# Altium PCB PCB2.PcbDoc (part 5 of 7)
Units mm, origin at the board's own origin, x right, y up, seen from the top; angles counter-clockwise.
Board outline 49 x 45 mm, 6 copper layers (Component Side, GND1, 3.3V, 1.2V, GND2, Solder Side), stack 1.629 mm thick; 56 components, 116 nets, 925 pads, 478 vias.
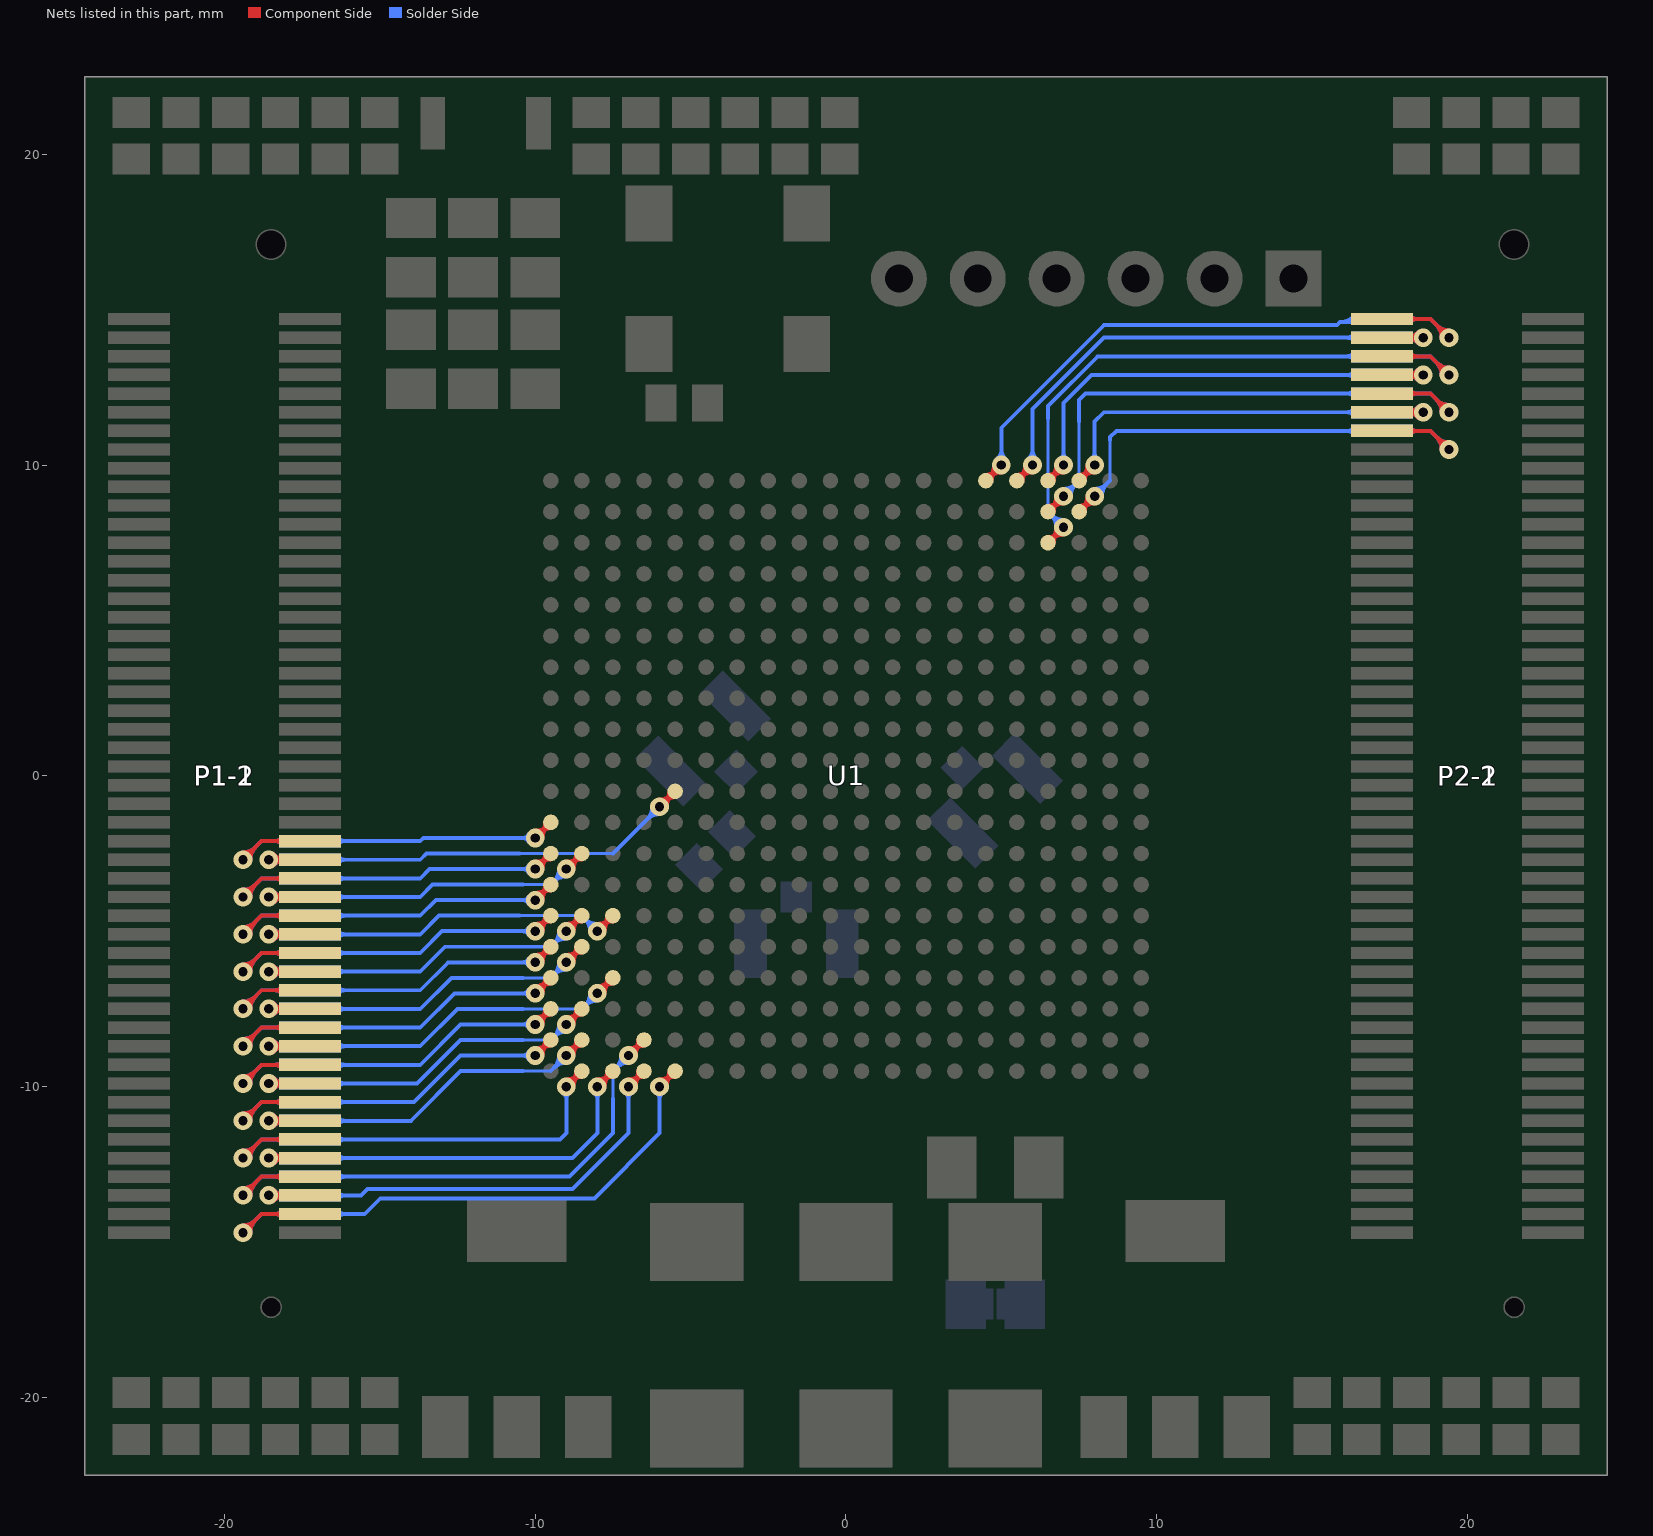
[diagram p9: the nets of this part, all layers, seen from the top]

## Via types
v1: diameter 0.6, hole 0.3, Component Side to Solder Side, tented both sides, 462 vias
v2: diameter 1.5, hole 0.8, Component Side to Solder Side, 10 vias
v3: diameter 1.2, hole 0.6, Component Side to Solder Side, 6 vias

## Nets (pads, with @x,y where several pads share a name; then routed paths per layer and width w, separated by ;. In a path a pad name is that pad's centre, name@x,y a point inside that pad or via, vN(x,y) a via of type N, cw(c..) or ccw(c..) an arc to the next point about the centre after c; other vN are vias at no path point) (continued)
P1-58: P1-1.58 P1-2.58 U1.M1 | length 23.6
  Component Side w0.127: v1(-19.404,-2.7) -18.804,-2.1 P1-1.58@-17.25,-2.1 ; v1(-10,-2) U1.M1@-9.5,-1.5 ; -19,-2.296 ccw(c-18.597,-2.7) -19.168,-2.7 cw(c-18.597,-2.7) -19,-2.296 ; -19,-2.296 cw(c-19.404,-1.893) -19.404,-2.464 ccw(c-19.404,-1.893) -19,-2.296 ; -18.38,-2.1 ccw(c-18.38,-1.77) -18.147,-2.003 cw(c-18.38,-1.77) -18.38,-2.1 ; -18.38,-2.1 cw(c-18.38,-2.43) -18.147,-2.197 ccw(c-18.38,-2.43) -18.38,-2.1 ; v1@-9.818,-1.818 ccw(c-10.137,-1.5) -9.686,-1.5 cw(c-10.137,-1.5) v1@-9.818,-1.818 ; v1@-9.818,-1.818 cw(c-9.5,-2.137) -9.5,-1.686 ccw(c-9.5,-2.137) v1@-9.818,-1.818 ; U1.M1@-9.596,-1.596 ccw(c-9.193,-2) -9.764,-2 cw(c-9.193,-2) U1.M1@-9.596,-1.596 ; U1.M1@-9.596,-1.596 cw(c-10,-1.193) -10,-1.764 ccw(c-10,-1.193) U1.M1@-9.596,-1.596
  Solder Side w0.127: v1(-19.404,-2.7) -18.804,-2.1 P1-2.58@-17.25,-2.1 -13.7,-2.1 -13.6,-2 -11.5,-2 -10.385,-2 ; v1(-10,-2) -10.385,-2 ; -19,-2.296 ccw(c-18.597,-2.7) -19.168,-2.7 cw(c-18.597,-2.7) -19,-2.296 ; -19,-2.296 cw(c-19.404,-1.893) -19.404,-2.464 ccw(c-19.404,-1.893) -19,-2.296 ; -18.38,-2.1 ccw(c-18.38,-1.77) -18.147,-2.003 cw(c-18.38,-1.77) -18.38,-2.1 ; -18.38,-2.1 cw(c-18.38,-2.43) -18.147,-2.197 ccw(c-18.38,-2.43) -18.38,-2.1 ; -16.12,-2.1 ccw(c-16.12,-2.43) -16.353,-2.197 cw(c-16.12,-2.43) -16.12,-2.1 ; -16.121,-2.1 cw(c-16.121,-1.771) -16.353,-2.003 ccw(c-16.121,-1.771) -16.121,-2.1 ; -10.385,-2 ccw(c-10.385,-1.805) -10.211,-1.893 cw(c-10.385,-1.805) -10.385,-2 ; -10.385,-2 cw(c-10.385,-2.195) -10.211,-2.107 ccw(c-10.385,-2.195) -10.385,-2
P1-60: P1-1.60 P1-2.60 U1.L5 | length 27.2
  Component Side w0.127: v1@-18.677,-2.7 v1(-18.577,-2.7) P1-1.60@-17.25,-2.7 ; v1(-6,-1) U1.L5@-5.5,-0.5 ; v1@-18.38,-2.7 ccw(c-18.38,-2.37) -18.147,-2.603 cw(c-18.38,-2.37) v1@-18.38,-2.7 ; v1@-18.38,-2.7 cw(c-18.38,-3.03) -18.147,-2.797 ccw(c-18.38,-3.03) v1@-18.38,-2.7 ; P1-1.60@-18.006,-2.7 ccw(c-18.006,-3.271) -18.41,-2.867 cw(c-18.006,-3.271) P1-1.60@-18.006,-2.7 ; P1-1.60@-18.006,-2.7 cw(c-18.006,-2.129) -18.41,-2.533 ccw(c-18.006,-2.129) P1-1.60@-18.006,-2.7 ; v1@-5.818,-0.818 ccw(c-6.137,-0.5) -5.687,-0.5 cw(c-6.137,-0.5) v1@-5.818,-0.818 ; v1@-5.818,-0.818 cw(c-5.5,-1.137) -5.5,-0.686 ccw(c-5.5,-1.137) v1@-5.818,-0.818 ; U1.L5@-5.596,-0.596 ccw(c-5.193,-1) -5.764,-1 cw(c-5.193,-1) U1.L5@-5.596,-0.596 ; U1.L5@-5.596,-0.596 cw(c-6,-0.193) -6,-0.764 ccw(c-6,-0.193) U1.L5@-5.596,-0.596
  Solder Side w0.1: -10.5,-2.5 -7.5,-2.5
  Solder Side w0.127: v1@-18.677,-2.7 v1(-18.577,-2.7) P1-2.60@-17.25,-2.7 -13.7,-2.7 -13.5,-2.5 -11.5,-2.5 -10.5,-2.5 ; -7.5,-2.5 v1(-6,-1) ; v1@-18.38,-2.7 ccw(c-18.38,-2.37) -18.147,-2.603 cw(c-18.38,-2.37) v1@-18.38,-2.7 ; v1@-18.38,-2.7 cw(c-18.38,-3.03) -18.147,-2.797 ccw(c-18.38,-3.03) v1@-18.38,-2.7 ; P1-2.60@-18.006,-2.7 ccw(c-18.006,-3.271) -18.41,-2.867 cw(c-18.006,-3.271) P1-2.60@-18.006,-2.7 ; P1-2.60@-18.006,-2.7 cw(c-18.006,-2.129) -18.41,-2.533 ccw(c-18.006,-2.129) P1-2.60@-18.006,-2.7 ; -16.12,-2.7 ccw(c-16.12,-3.03) -16.353,-2.797 cw(c-16.12,-3.03) -16.12,-2.7 ; -16.121,-2.7 cw(c-16.121,-2.371) -16.353,-2.603 ccw(c-16.121,-2.371) -16.121,-2.7 ; -6.404,-1.404 ccw(c-6.807,-1) -6.237,-1 cw(c-6.807,-1) -6.404,-1.404 ; -6.404,-1.404 cw(c-6,-1.807) -6,-1.237 ccw(c-6,-1.807) -6.404,-1.404
P1-62: P1-1.62 P1-2.62 U1.N1 | length 23.7
  Component Side w0.127: v1(-19.404,-3.9) -18.804,-3.3 P1-1.62@-17.25,-3.3 ; v1(-10,-3) U1.N1@-9.5,-2.5 ; -19,-3.496 ccw(c-18.597,-3.9) -19.168,-3.9 cw(c-18.597,-3.9) -19,-3.496 ; -19,-3.496 cw(c-19.404,-3.093) -19.404,-3.664 ccw(c-19.404,-3.093) -19,-3.496 ; -18.38,-3.3 ccw(c-18.38,-2.97) -18.147,-3.203 cw(c-18.38,-2.97) -18.38,-3.3 ; -18.38,-3.3 cw(c-18.38,-3.63) -18.147,-3.397 ccw(c-18.38,-3.63) -18.38,-3.3 ; v1@-9.818,-2.818 ccw(c-10.137,-2.5) -9.686,-2.5 cw(c-10.137,-2.5) v1@-9.818,-2.818 ; v1@-9.818,-2.818 cw(c-9.5,-3.137) -9.5,-2.686 ccw(c-9.5,-3.137) v1@-9.818,-2.818 ; U1.N1@-9.596,-2.596 ccw(c-9.193,-3) -9.764,-3 cw(c-9.193,-3) U1.N1@-9.596,-2.596 ; U1.N1@-9.596,-2.596 cw(c-10,-2.193) -10,-2.764 ccw(c-10,-2.193) U1.N1@-9.596,-2.596
  Solder Side w0.127: v1(-19.404,-3.9) -18.804,-3.3 P1-2.62@-17.25,-3.3 ; P1-2.62@-17.2,-3.3 P1-2.62@-17.25,-3.3 ; v1(-10,-3) -10.385,-3 ; -19,-3.496 ccw(c-18.597,-3.9) -19.168,-3.9 cw(c-18.597,-3.9) -19,-3.496 ; -19,-3.496 cw(c-19.404,-3.093) -19.404,-3.664 ccw(c-19.404,-3.093) -19,-3.496 ; -18.38,-3.3 ccw(c-18.38,-2.97) -18.147,-3.203 cw(c-18.38,-2.97) -18.38,-3.3 ; -18.38,-3.3 cw(c-18.38,-3.63) -18.147,-3.397 ccw(c-18.38,-3.63) -18.38,-3.3 ; P1-2.62@-17.25,-3.3 -13.7,-3.3 -13.4,-3 -11.5,-3 -10.385,-3 ; -16.12,-3.3 ccw(c-16.12,-3.63) -16.353,-3.397 cw(c-16.12,-3.63) -16.12,-3.3 ; -16.121,-3.3 cw(c-16.121,-2.971) -16.353,-3.203 ccw(c-16.121,-2.971) -16.121,-3.3 ; -10.385,-3 ccw(c-10.385,-2.805) -10.211,-2.893 cw(c-10.385,-2.805) -10.385,-3 ; -10.385,-3 cw(c-10.385,-3.195) -10.211,-3.107 ccw(c-10.385,-3.195) -10.385,-3
P1-64: P1-1.64 P1-2.64 U1.N2 | length 23.9
  Component Side w0.127: v1@-18.677,-3.9 v1(-18.577,-3.9) P1-1.64@-17.25,-3.9 ; v1(-9,-3) U1.N2@-8.5,-2.5 ; v1@-18.38,-3.9 ccw(c-18.38,-3.57) -18.147,-3.803 cw(c-18.38,-3.57) v1@-18.38,-3.9 ; v1@-18.38,-3.9 cw(c-18.38,-4.23) -18.147,-3.997 ccw(c-18.38,-4.23) v1@-18.38,-3.9 ; P1-1.64@-18.006,-3.9 ccw(c-18.006,-4.471) -18.41,-4.067 cw(c-18.006,-4.471) P1-1.64@-18.006,-3.9 ; P1-1.64@-18.006,-3.9 cw(c-18.006,-3.329) -18.41,-3.733 ccw(c-18.006,-3.329) P1-1.64@-18.006,-3.9 ; v1@-8.818,-2.818 ccw(c-9.137,-2.5) -8.686,-2.5 cw(c-9.137,-2.5) v1@-8.818,-2.818 ; v1@-8.818,-2.818 cw(c-8.5,-3.137) -8.5,-2.686 ccw(c-8.5,-3.137) v1@-8.818,-2.818 ; U1.N2@-8.596,-2.596 ccw(c-8.193,-3) -8.764,-3 cw(c-8.193,-3) U1.N2@-8.596,-2.596 ; U1.N2@-8.596,-2.596 cw(c-9,-2.193) -9,-2.764 ccw(c-9,-2.193) U1.N2@-8.596,-2.596
  Solder Side w0.1: -10.385,-3.5 -9.5,-3.5
  Solder Side w0.127: v1@-18.677,-3.9 v1(-18.577,-3.9) P1-2.64@-17.25,-3.9 -13.7,-3.9 -13.3,-3.5 -11.5,-3.5 -10.385,-3.5 ; -9.5,-3.5 v1(-9,-3) ; v1@-18.38,-3.9 ccw(c-18.38,-3.57) -18.147,-3.803 cw(c-18.38,-3.57) v1@-18.38,-3.9 ; v1@-18.38,-3.9 cw(c-18.38,-4.23) -18.147,-3.997 ccw(c-18.38,-4.23) v1@-18.38,-3.9 ; P1-2.64@-18.006,-3.9 ccw(c-18.006,-4.471) -18.41,-4.067 cw(c-18.006,-4.471) P1-2.64@-18.006,-3.9 ; P1-2.64@-18.006,-3.9 cw(c-18.006,-3.329) -18.41,-3.733 ccw(c-18.006,-3.329) P1-2.64@-18.006,-3.9 ; -16.12,-3.9 ccw(c-16.12,-4.23) -16.353,-3.997 cw(c-16.12,-4.23) -16.12,-3.9 ; -16.121,-3.9 cw(c-16.121,-3.571) -16.353,-3.803 ccw(c-16.121,-3.571) -16.121,-3.9 ; -9.404,-3.404 ccw(c-9.807,-3) -9.237,-3 cw(c-9.807,-3) -9.404,-3.404 ; -9.404,-3.404 cw(c-9,-3.807) -9,-3.237 ccw(c-9,-3.807) -9.404,-3.404
P1-66: P1-1.66 P1-2.66 U1.P1 | length 23.8
  Component Side w0.127: v1(-19.404,-5.1) -18.804,-4.5 P1-1.66@-17.25,-4.5 ; v1(-10,-4) U1.P1@-9.5,-3.5 ; -19,-4.696 ccw(c-18.597,-5.1) -19.168,-5.1 cw(c-18.597,-5.1) -19,-4.696 ; -19,-4.696 cw(c-19.404,-4.293) -19.404,-4.864 ccw(c-19.404,-4.293) -19,-4.696 ; -18.38,-4.5 ccw(c-18.38,-4.17) -18.147,-4.403 cw(c-18.38,-4.17) -18.38,-4.5 ; -18.38,-4.5 cw(c-18.38,-4.83) -18.147,-4.597 ccw(c-18.38,-4.83) -18.38,-4.5 ; v1@-9.818,-3.818 ccw(c-10.137,-3.5) -9.686,-3.5 cw(c-10.137,-3.5) v1@-9.818,-3.818 ; v1@-9.818,-3.818 cw(c-9.5,-4.137) -9.5,-3.686 ccw(c-9.5,-4.137) v1@-9.818,-3.818 ; U1.P1@-9.596,-3.596 ccw(c-9.193,-4) -9.764,-4 cw(c-9.193,-4) U1.P1@-9.596,-3.596 ; U1.P1@-9.596,-3.596 cw(c-10,-3.193) -10,-3.764 ccw(c-10,-3.193) U1.P1@-9.596,-3.596
  Solder Side w0.127: v1(-19.404,-5.1) -18.804,-4.5 P1-2.66@-17.25,-4.5 ; P1-2.66@-17.2,-4.5 P1-2.66@-17.25,-4.5 ; v1(-10,-4) -10.385,-4 ; -19,-4.696 ccw(c-18.597,-5.1) -19.168,-5.1 cw(c-18.597,-5.1) -19,-4.696 ; -19,-4.696 cw(c-19.404,-4.293) -19.404,-4.864 ccw(c-19.404,-4.293) -19,-4.696 ; -18.38,-4.5 ccw(c-18.38,-4.17) -18.147,-4.403 cw(c-18.38,-4.17) -18.38,-4.5 ; -18.38,-4.5 cw(c-18.38,-4.83) -18.147,-4.597 ccw(c-18.38,-4.83) -18.38,-4.5 ; P1-2.66@-17.25,-4.5 -13.7,-4.5 -13.2,-4 -11.5,-4 -10.385,-4 ; -16.12,-4.5 ccw(c-16.12,-4.83) -16.353,-4.597 cw(c-16.12,-4.83) -16.12,-4.5 ; -16.121,-4.5 cw(c-16.121,-4.171) -16.353,-4.403 ccw(c-16.121,-4.171) -16.121,-4.5 ; -10.385,-4 ccw(c-10.385,-3.805) -10.211,-3.893 cw(c-10.385,-3.805) -10.385,-4 ; -10.385,-4 cw(c-10.385,-4.195) -10.211,-4.107 ccw(c-10.385,-4.195) -10.385,-4
P1-68: P1-1.68 P1-2.68 U1.R3 | length 26.2
  Component Side w0.127: v1@-18.677,-5.1 v1(-18.577,-5.1) P1-1.68@-17.25,-5.1 ; v1(-8,-5) U1.R3@-7.5,-4.5 ; v1@-18.38,-5.1 ccw(c-18.38,-4.77) -18.147,-5.003 cw(c-18.38,-4.77) v1@-18.38,-5.1 ; v1@-18.38,-5.1 cw(c-18.38,-5.43) -18.147,-5.197 ccw(c-18.38,-5.43) v1@-18.38,-5.1 ; P1-1.68@-18.006,-5.1 ccw(c-18.006,-5.671) -18.41,-5.267 cw(c-18.006,-5.671) P1-1.68@-18.006,-5.1 ; P1-1.68@-18.006,-5.1 cw(c-18.006,-4.529) -18.41,-4.933 ccw(c-18.006,-4.529) P1-1.68@-18.006,-5.1 ; v1@-7.818,-4.818 ccw(c-8.137,-4.5) -7.686,-4.5 cw(c-8.137,-4.5) v1@-7.818,-4.818 ; v1@-7.818,-4.818 cw(c-7.5,-5.137) -7.5,-4.686 ccw(c-7.5,-5.137) v1@-7.818,-4.818 ; U1.R3@-7.596,-4.596 ccw(c-7.193,-5) -7.764,-5 cw(c-7.193,-5) U1.R3@-7.596,-4.596 ; U1.R3@-7.596,-4.596 cw(c-8,-4.193) -8,-4.764 ccw(c-8,-4.193) U1.R3@-7.596,-4.596
  Solder Side w0.1: -10.5,-4.5 -8.5,-4.5 v1(-8,-5) ; -8.427,-4.573 ccw(c-8,-4.146) -8,-4.75 cw(c-8,-4.146) -8.427,-4.573 ; -8.427,-4.573 cw(c-8.854,-5) -8.25,-5 ccw(c-8.854,-5) -8.427,-4.573 ; -8.256,-4.744 ccw(c-8,-4.488) -8,-4.85 cw(c-8,-4.488) -8.256,-4.744 ; -8.256,-4.744 cw(c-8.512,-5) -8.15,-5 ccw(c-8.512,-5) -8.256,-4.744
  Solder Side w0.127: v1@-18.677,-5.1 v1(-18.577,-5.1) P1-2.68@-17.25,-5.1 -13.7,-5.1 -13.1,-4.5 -11.5,-4.5 -10.5,-4.5 ; v1@-18.38,-5.1 ccw(c-18.38,-4.77) -18.147,-5.003 cw(c-18.38,-4.77) v1@-18.38,-5.1 ; v1@-18.38,-5.1 cw(c-18.38,-5.43) -18.147,-5.197 ccw(c-18.38,-5.43) v1@-18.38,-5.1 ; P1-2.68@-18.006,-5.1 ccw(c-18.006,-5.671) -18.41,-5.267 cw(c-18.006,-5.671) P1-2.68@-18.006,-5.1 ; P1-2.68@-18.006,-5.1 cw(c-18.006,-4.529) -18.41,-4.933 ccw(c-18.006,-4.529) P1-2.68@-18.006,-5.1 ; -16.12,-5.1 ccw(c-16.12,-5.43) -16.353,-5.197 cw(c-16.12,-5.43) -16.12,-5.1 ; -16.121,-5.1 cw(c-16.121,-4.771) -16.353,-5.003 ccw(c-16.121,-4.771) -16.121,-5.1
P1-70: P1-1.70 P1-2.70 U1.R1 | length 23.8
  Component Side w0.127: v1(-19.404,-6.3) -18.804,-5.7 P1-1.70@-17.25,-5.7 ; v1(-10,-5) U1.R1@-9.5,-4.5 ; -19,-5.896 ccw(c-18.597,-6.3) -19.168,-6.3 cw(c-18.597,-6.3) -19,-5.896 ; -19,-5.896 cw(c-19.404,-5.493) -19.404,-6.064 ccw(c-19.404,-5.493) -19,-5.896 ; -18.38,-5.7 ccw(c-18.38,-5.37) -18.147,-5.603 cw(c-18.38,-5.37) -18.38,-5.7 ; -18.38,-5.7 cw(c-18.38,-6.03) -18.147,-5.797 ccw(c-18.38,-6.03) -18.38,-5.7 ; v1@-9.818,-4.818 ccw(c-10.137,-4.5) -9.686,-4.5 cw(c-10.137,-4.5) v1@-9.818,-4.818 ; v1@-9.818,-4.818 cw(c-9.5,-5.137) -9.5,-4.686 ccw(c-9.5,-5.137) v1@-9.818,-4.818 ; U1.R1@-9.596,-4.596 ccw(c-9.193,-5) -9.764,-5 cw(c-9.193,-5) U1.R1@-9.596,-4.596 ; U1.R1@-9.596,-4.596 cw(c-10,-4.193) -10,-4.764 ccw(c-10,-4.193) U1.R1@-9.596,-4.596
  Solder Side w0.127: v1(-19.404,-6.3) -18.804,-5.7 P1-2.70@-17.25,-5.7 -13.7,-5.7 -13,-5 -11.5,-5 -10.385,-5 ; v1(-10,-5) -10.385,-5 ; -19,-5.896 ccw(c-18.597,-6.3) -19.168,-6.3 cw(c-18.597,-6.3) -19,-5.896 ; -19,-5.896 cw(c-19.404,-5.493) -19.404,-6.064 ccw(c-19.404,-5.493) -19,-5.896 ; -18.38,-5.7 ccw(c-18.38,-5.37) -18.147,-5.603 cw(c-18.38,-5.37) -18.38,-5.7 ; -18.38,-5.7 cw(c-18.38,-6.03) -18.147,-5.797 ccw(c-18.38,-6.03) -18.38,-5.7 ; -16.12,-5.7 ccw(c-16.12,-6.03) -16.353,-5.797 cw(c-16.12,-6.03) -16.12,-5.7 ; -16.121,-5.7 cw(c-16.121,-5.371) -16.353,-5.603 ccw(c-16.121,-5.371) -16.121,-5.7 ; -10.385,-5 ccw(c-10.385,-4.805) -10.211,-4.893 cw(c-10.385,-4.805) -10.385,-5 ; -10.385,-5 cw(c-10.385,-5.195) -10.211,-5.107 ccw(c-10.385,-5.195) -10.385,-5
P1-72: P1-1.72 P1-2.72 U1.R2 | length 24
  Component Side w0.127: v1@-18.677,-6.3 v1(-18.577,-6.3) P1-1.72@-17.25,-6.3 ; v1(-9,-5) U1.R2@-8.5,-4.5 ; v1@-18.38,-6.3 ccw(c-18.38,-5.97) -18.147,-6.203 cw(c-18.38,-5.97) v1@-18.38,-6.3 ; v1@-18.38,-6.3 cw(c-18.38,-6.63) -18.147,-6.397 ccw(c-18.38,-6.63) v1@-18.38,-6.3 ; P1-1.72@-18.006,-6.3 ccw(c-18.006,-6.871) -18.41,-6.467 cw(c-18.006,-6.871) P1-1.72@-18.006,-6.3 ; P1-1.72@-18.006,-6.3 cw(c-18.006,-5.729) -18.41,-6.133 ccw(c-18.006,-5.729) P1-1.72@-18.006,-6.3 ; v1@-8.818,-4.818 ccw(c-9.137,-4.5) -8.686,-4.5 cw(c-9.137,-4.5) v1@-8.818,-4.818 ; v1@-8.818,-4.818 cw(c-8.5,-5.137) -8.5,-4.686 ccw(c-8.5,-5.137) v1@-8.818,-4.818 ; U1.R2@-8.596,-4.596 ccw(c-8.193,-5) -8.764,-5 cw(c-8.193,-5) U1.R2@-8.596,-4.596 ; U1.R2@-8.596,-4.596 cw(c-9,-4.193) -9,-4.764 ccw(c-9,-4.193) U1.R2@-8.596,-4.596
  Solder Side w0.1: -10.385,-5.5 -9.5,-5.5
  Solder Side w0.127: v1@-18.677,-6.3 v1(-18.577,-6.3) P1-2.72@-17.25,-6.3 -13.7,-6.3 -12.9,-5.5 -11.5,-5.5 -10.385,-5.5 ; -9.5,-5.5 v1(-9,-5) ; v1@-18.38,-6.3 ccw(c-18.38,-5.97) -18.147,-6.203 cw(c-18.38,-5.97) v1@-18.38,-6.3 ; v1@-18.38,-6.3 cw(c-18.38,-6.63) -18.147,-6.397 ccw(c-18.38,-6.63) v1@-18.38,-6.3 ; P1-2.72@-18.006,-6.3 ccw(c-18.006,-6.871) -18.41,-6.467 cw(c-18.006,-6.871) P1-2.72@-18.006,-6.3 ; P1-2.72@-18.006,-6.3 cw(c-18.006,-5.729) -18.41,-6.133 ccw(c-18.006,-5.729) P1-2.72@-18.006,-6.3 ; -16.12,-6.3 ccw(c-16.12,-6.63) -16.353,-6.397 cw(c-16.12,-6.63) -16.12,-6.3 ; -16.121,-6.3 cw(c-16.121,-5.971) -16.353,-6.203 ccw(c-16.121,-5.971) -16.121,-6.3 ; -9.404,-5.404 ccw(c-9.807,-5) -9.237,-5 cw(c-9.807,-5) -9.404,-5.404 ; -9.404,-5.404 cw(c-9,-5.807) -9,-5.237 ccw(c-9,-5.807) -9.404,-5.404
P1-74: P1-1.74 P1-2.74 U1.T1 | length 23.9
  Component Side w0.127: v1(-19.404,-7.5) -18.804,-6.9 P1-1.74@-17.25,-6.9 ; v1(-10,-6) U1.T1@-9.5,-5.5 ; -19,-7.096 ccw(c-18.597,-7.5) -19.168,-7.5 cw(c-18.597,-7.5) -19,-7.096 ; -19,-7.096 cw(c-19.404,-6.693) -19.404,-7.264 ccw(c-19.404,-6.693) -19,-7.096 ; -18.38,-6.9 ccw(c-18.38,-6.57) -18.147,-6.803 cw(c-18.38,-6.57) -18.38,-6.9 ; -18.38,-6.9 cw(c-18.38,-7.23) -18.147,-6.997 ccw(c-18.38,-7.23) -18.38,-6.9 ; v1@-9.818,-5.818 ccw(c-10.137,-5.5) -9.686,-5.5 cw(c-10.137,-5.5) v1@-9.818,-5.818 ; v1@-9.818,-5.818 cw(c-9.5,-6.137) -9.5,-5.686 ccw(c-9.5,-6.137) v1@-9.818,-5.818 ; U1.T1@-9.596,-5.596 ccw(c-9.193,-6) -9.764,-6 cw(c-9.193,-6) U1.T1@-9.596,-5.596 ; U1.T1@-9.596,-5.596 cw(c-10,-5.193) -10,-5.764 ccw(c-10,-5.193) U1.T1@-9.596,-5.596
  Solder Side w0.127: v1(-19.404,-7.5) -18.804,-6.9 P1-2.74@-17.25,-6.9 ; P1-2.74@-17.2,-6.9 P1-2.74@-17.25,-6.9 ; v1(-10,-6) -10.385,-6 ; -19,-7.096 ccw(c-18.597,-7.5) -19.168,-7.5 cw(c-18.597,-7.5) -19,-7.096 ; -19,-7.096 cw(c-19.404,-6.693) -19.404,-7.264 ccw(c-19.404,-6.693) -19,-7.096 ; -18.38,-6.9 ccw(c-18.38,-6.57) -18.147,-6.803 cw(c-18.38,-6.57) -18.38,-6.9 ; -18.38,-6.9 cw(c-18.38,-7.23) -18.147,-6.997 ccw(c-18.38,-7.23) -18.38,-6.9 ; P1-2.74@-17.25,-6.9 -13.7,-6.9 -12.8,-6 -11.5,-6 -10.385,-6 ; -16.12,-6.9 ccw(c-16.12,-7.23) -16.353,-6.997 cw(c-16.12,-7.23) -16.12,-6.9 ; -16.121,-6.9 cw(c-16.121,-6.571) -16.353,-6.803 ccw(c-16.121,-6.571) -16.121,-6.9 ; -10.385,-6 ccw(c-10.385,-5.805) -10.211,-5.893 cw(c-10.385,-5.805) -10.385,-6 ; -10.385,-6 cw(c-10.385,-6.195) -10.211,-6.107 ccw(c-10.385,-6.195) -10.385,-6
P1-76: P1-1.76 P1-2.76 U1.T2 | length 24.1
  Component Side w0.127: v1@-18.677,-7.5 v1(-18.577,-7.5) P1-1.76@-17.25,-7.5 ; v1(-9,-6) U1.T2@-8.5,-5.5 ; v1@-18.38,-7.5 ccw(c-18.38,-7.17) -18.147,-7.403 cw(c-18.38,-7.17) v1@-18.38,-7.5 ; v1@-18.38,-7.5 cw(c-18.38,-7.83) -18.147,-7.597 ccw(c-18.38,-7.83) v1@-18.38,-7.5 ; P1-1.76@-18.006,-7.5 ccw(c-18.006,-8.071) -18.41,-7.667 cw(c-18.006,-8.071) P1-1.76@-18.006,-7.5 ; P1-1.76@-18.006,-7.5 cw(c-18.006,-6.929) -18.41,-7.333 ccw(c-18.006,-6.929) P1-1.76@-18.006,-7.5 ; v1@-8.818,-5.818 ccw(c-9.137,-5.5) -8.686,-5.5 cw(c-9.137,-5.5) v1@-8.818,-5.818 ; v1@-8.818,-5.818 cw(c-8.5,-6.137) -8.5,-5.686 ccw(c-8.5,-6.137) v1@-8.818,-5.818 ; U1.T2@-8.596,-5.596 ccw(c-8.193,-6) -8.764,-6 cw(c-8.193,-6) U1.T2@-8.596,-5.596 ; U1.T2@-8.596,-5.596 cw(c-9,-5.193) -9,-5.764 ccw(c-9,-5.193) U1.T2@-8.596,-5.596
  Solder Side w0.1: -10.385,-6.5 -9.5,-6.5
  Solder Side w0.127: v1@-18.677,-7.5 v1(-18.577,-7.5) P1-2.76@-17.25,-7.5 -13.7,-7.5 -12.7,-6.5 -11.5,-6.5 -10.385,-6.5 ; -9.5,-6.5 v1(-9,-6) ; v1@-18.38,-7.5 ccw(c-18.38,-7.17) -18.147,-7.403 cw(c-18.38,-7.17) v1@-18.38,-7.5 ; v1@-18.38,-7.5 cw(c-18.38,-7.83) -18.147,-7.597 ccw(c-18.38,-7.83) v1@-18.38,-7.5 ; P1-2.76@-18.006,-7.5 ccw(c-18.006,-8.071) -18.41,-7.667 cw(c-18.006,-8.071) P1-2.76@-18.006,-7.5 ; P1-2.76@-18.006,-7.5 cw(c-18.006,-6.929) -18.41,-7.333 ccw(c-18.006,-6.929) P1-2.76@-18.006,-7.5 ; -16.12,-7.5 ccw(c-16.12,-7.83) -16.353,-7.597 cw(c-16.12,-7.83) -16.12,-7.5 ; -16.121,-7.5 cw(c-16.121,-7.171) -16.353,-7.403 ccw(c-16.121,-7.171) -16.121,-7.5 ; -9.404,-6.404 ccw(c-9.807,-6) -9.237,-6 cw(c-9.807,-6) -9.404,-6.404 ; -9.404,-6.404 cw(c-9,-6.807) -9,-6.237 ccw(c-9,-6.807) -9.404,-6.404
P1-78: P1-1.78 P1-2.78 U1.U1 | length 24
  Component Side w0.127: v1(-19.404,-8.7) -18.804,-8.1 P1-1.78@-17.25,-8.1 ; v1(-10,-7) U1.U1@-9.5,-6.5 ; -19,-8.296 ccw(c-18.597,-8.7) -19.168,-8.7 cw(c-18.597,-8.7) -19,-8.296 ; -19,-8.296 cw(c-19.404,-7.893) -19.404,-8.464 ccw(c-19.404,-7.893) -19,-8.296 ; -18.38,-8.1 ccw(c-18.38,-7.77) -18.147,-8.003 cw(c-18.38,-7.77) -18.38,-8.1 ; -18.38,-8.1 cw(c-18.38,-8.43) -18.147,-8.197 ccw(c-18.38,-8.43) -18.38,-8.1 ; v1@-9.818,-6.818 ccw(c-10.137,-6.5) -9.686,-6.5 cw(c-10.137,-6.5) v1@-9.818,-6.818 ; v1@-9.818,-6.818 cw(c-9.5,-7.137) -9.5,-6.686 ccw(c-9.5,-7.137) v1@-9.818,-6.818 ; U1.U1@-9.596,-6.596 ccw(c-9.193,-7) -9.764,-7 cw(c-9.193,-7) U1.U1@-9.596,-6.596 ; U1.U1@-9.596,-6.596 cw(c-10,-6.193) -10,-6.764 ccw(c-10,-6.193) U1.U1@-9.596,-6.596
  Solder Side w0.127: v1(-19.404,-8.7) -18.804,-8.1 P1-2.78@-17.25,-8.1 ; P1-2.78@-17.2,-8.1 P1-2.78@-17.25,-8.1 ; v1(-10,-7) -10.385,-7 ; -19,-8.296 ccw(c-18.597,-8.7) -19.168,-8.7 cw(c-18.597,-8.7) -19,-8.296 ; -19,-8.296 cw(c-19.404,-7.893) -19.404,-8.464 ccw(c-19.404,-7.893) -19,-8.296 ; -18.38,-8.1 ccw(c-18.38,-7.77) -18.147,-8.003 cw(c-18.38,-7.77) -18.38,-8.1 ; -18.38,-8.1 cw(c-18.38,-8.43) -18.147,-8.197 ccw(c-18.38,-8.43) -18.38,-8.1 ; P1-2.78@-17.25,-8.1 -13.7,-8.1 -12.6,-7 -11.5,-7 -10.385,-7 ; -16.12,-8.1 ccw(c-16.12,-8.43) -16.353,-8.197 cw(c-16.12,-8.43) -16.12,-8.1 ; -16.121,-8.1 cw(c-16.121,-7.771) -16.353,-8.003 ccw(c-16.121,-7.771) -16.121,-8.1 ; -10.385,-7 ccw(c-10.385,-6.805) -10.211,-6.893 cw(c-10.385,-6.805) -10.385,-7 ; -10.385,-7 cw(c-10.385,-7.195) -10.211,-7.107 ccw(c-10.385,-7.195) -10.385,-7
P1-80: P1-1.80 P1-2.80 U1.U3 | length 25.2
  Component Side w0.127: v1@-18.677,-8.7 v1(-18.577,-8.7) P1-1.80@-17.25,-8.7 ; v1(-8,-7) U1.U3@-7.5,-6.5 ; v1@-18.38,-8.7 ccw(c-18.38,-8.37) -18.147,-8.603 cw(c-18.38,-8.37) v1@-18.38,-8.7 ; v1@-18.38,-8.7 cw(c-18.38,-9.03) -18.147,-8.797 ccw(c-18.38,-9.03) v1@-18.38,-8.7 ; P1-1.80@-18.006,-8.7 ccw(c-18.006,-9.271) -18.41,-8.867 cw(c-18.006,-9.271) P1-1.80@-18.006,-8.7 ; P1-1.80@-18.006,-8.7 cw(c-18.006,-8.129) -18.41,-8.533 ccw(c-18.006,-8.129) P1-1.80@-18.006,-8.7 ; v1@-7.818,-6.818 ccw(c-8.137,-6.5) -7.686,-6.5 cw(c-8.137,-6.5) v1@-7.818,-6.818 ; v1@-7.818,-6.818 cw(c-7.5,-7.137) -7.5,-6.686 ccw(c-7.5,-7.137) v1@-7.818,-6.818 ; U1.U3@-7.596,-6.596 ccw(c-7.193,-7) -7.764,-7 cw(c-7.193,-7) U1.U3@-7.596,-6.596 ; U1.U3@-7.596,-6.596 cw(c-8,-6.193) -8,-6.764 ccw(c-8,-6.193) U1.U3@-7.596,-6.596
  Solder Side w0.1: -10.385,-7.5 -8.5,-7.5
  Solder Side w0.127: v1@-18.677,-8.7 v1(-18.577,-8.7) P1-2.80@-17.25,-8.7 -13.7,-8.7 -12.5,-7.5 -11.5,-7.5 -10.385,-7.5 ; -8.5,-7.5 v1(-8,-7) ; v1@-18.38,-8.7 ccw(c-18.38,-8.37) -18.147,-8.603 cw(c-18.38,-8.37) v1@-18.38,-8.7 ; v1@-18.38,-8.7 cw(c-18.38,-9.03) -18.147,-8.797 ccw(c-18.38,-9.03) v1@-18.38,-8.7 ; P1-2.80@-18.006,-8.7 ccw(c-18.006,-9.271) -18.41,-8.867 cw(c-18.006,-9.271) P1-2.80@-18.006,-8.7 ; P1-2.80@-18.006,-8.7 cw(c-18.006,-8.129) -18.41,-8.533 ccw(c-18.006,-8.129) P1-2.80@-18.006,-8.7 ; -16.12,-8.7 ccw(c-16.12,-9.03) -16.353,-8.797 cw(c-16.12,-9.03) -16.12,-8.7 ; -16.121,-8.7 cw(c-16.121,-8.371) -16.353,-8.603 ccw(c-16.121,-8.371) -16.121,-8.7 ; -8.404,-7.404 ccw(c-8.807,-7) -8.237,-7 cw(c-8.807,-7) -8.404,-7.404 ; -8.404,-7.404 cw(c-8,-7.807) -8,-7.237 ccw(c-8,-7.807) -8.404,-7.404
P1-82: P1-1.82 P1-2.82 U1.V1 | length 24.1
  Component Side w0.127: v1(-19.404,-9.9) -18.804,-9.3 P1-1.82@-17.25,-9.3 ; v1(-10,-8) U1.V1@-9.5,-7.5 ; -19,-9.496 ccw(c-18.597,-9.9) -19.168,-9.9 cw(c-18.597,-9.9) -19,-9.496 ; -19,-9.496 cw(c-19.404,-9.093) -19.404,-9.664 ccw(c-19.404,-9.093) -19,-9.496 ; -18.38,-9.3 ccw(c-18.38,-8.97) -18.147,-9.203 cw(c-18.38,-8.97) -18.38,-9.3 ; -18.38,-9.3 cw(c-18.38,-9.63) -18.147,-9.397 ccw(c-18.38,-9.63) -18.38,-9.3 ; v1@-9.818,-7.818 ccw(c-10.137,-7.5) -9.686,-7.5 cw(c-10.137,-7.5) v1@-9.818,-7.818 ; v1@-9.818,-7.818 cw(c-9.5,-8.137) -9.5,-7.686 ccw(c-9.5,-8.137) v1@-9.818,-7.818 ; U1.V1@-9.596,-7.596 ccw(c-9.193,-8) -9.764,-8 cw(c-9.193,-8) U1.V1@-9.596,-7.596 ; U1.V1@-9.596,-7.596 cw(c-10,-7.193) -10,-7.764 ccw(c-10,-7.193) U1.V1@-9.596,-7.596
  Solder Side w0.127: v1(-19.404,-9.9) -18.804,-9.3 P1-2.82@-17.25,-9.3 -13.7,-9.3 -12.4,-8 -11.5,-8 -10.385,-8 ; v1(-10,-8) -10.385,-8 ; -19,-9.496 ccw(c-18.597,-9.9) -19.168,-9.9 cw(c-18.597,-9.9) -19,-9.496 ; -19,-9.496 cw(c-19.404,-9.093) -19.404,-9.664 ccw(c-19.404,-9.093) -19,-9.496 ; -18.38,-9.3 ccw(c-18.38,-8.97) -18.147,-9.203 cw(c-18.38,-8.97) -18.38,-9.3 ; -18.38,-9.3 cw(c-18.38,-9.63) -18.147,-9.397 ccw(c-18.38,-9.63) -18.38,-9.3 ; -16.12,-9.3 ccw(c-16.12,-9.63) -16.353,-9.397 cw(c-16.12,-9.63) -16.12,-9.3 ; -16.121,-9.3 cw(c-16.121,-8.971) -16.353,-9.203 ccw(c-16.121,-8.971) -16.121,-9.3 ; -10.385,-8 ccw(c-10.385,-7.805) -10.211,-7.893 cw(c-10.385,-7.805) -10.385,-8 ; -10.385,-8 cw(c-10.385,-8.195) -10.211,-8.107 ccw(c-10.385,-8.195) -10.385,-8
P1-84: P1-1.84 P1-2.84 U1.V2 | length 24.3
  Component Side w0.127: v1@-18.677,-9.9 v1(-18.577,-9.9) P1-1.84@-17.25,-9.9 ; v1(-9,-8) U1.V2@-8.5,-7.5 ; v1@-18.38,-9.9 ccw(c-18.38,-9.57) -18.147,-9.803 cw(c-18.38,-9.57) v1@-18.38,-9.9 ; v1@-18.38,-9.9 cw(c-18.38,-10.23) -18.147,-9.997 ccw(c-18.38,-10.23) v1@-18.38,-9.9 ; P1-1.84@-18.006,-9.9 ccw(c-18.006,-10.471) -18.41,-10.067 cw(c-18.006,-10.471) P1-1.84@-18.006,-9.9 ; P1-1.84@-18.006,-9.9 cw(c-18.006,-9.329) -18.41,-9.733 ccw(c-18.006,-9.329) P1-1.84@-18.006,-9.9 ; v1@-8.818,-7.818 ccw(c-9.137,-7.5) -8.686,-7.5 cw(c-9.137,-7.5) v1@-8.818,-7.818 ; v1@-8.818,-7.818 cw(c-8.5,-8.137) -8.5,-7.686 ccw(c-8.5,-8.137) v1@-8.818,-7.818 ; U1.V2@-8.596,-7.596 ccw(c-8.193,-8) -8.764,-8 cw(c-8.193,-8) U1.V2@-8.596,-7.596 ; U1.V2@-8.596,-7.596 cw(c-9,-7.193) -9,-7.764 ccw(c-9,-7.193) U1.V2@-8.596,-7.596
  Solder Side w0.1: -10.385,-8.5 -9.5,-8.5
  Solder Side w0.127: v1@-18.677,-9.9 v1(-18.577,-9.9) P1-2.84@-17.25,-9.9 -13.8,-9.9 -12.4,-8.5 -11.5,-8.5 -10.385,-8.5 ; -9.5,-8.5 v1(-9,-8) ; v1@-18.38,-9.9 ccw(c-18.38,-9.57) -18.147,-9.803 cw(c-18.38,-9.57) v1@-18.38,-9.9 ; v1@-18.38,-9.9 cw(c-18.38,-10.23) -18.147,-9.997 ccw(c-18.38,-10.23) v1@-18.38,-9.9 ; P1-2.84@-18.006,-9.9 ccw(c-18.006,-10.471) -18.41,-10.067 cw(c-18.006,-10.471) P1-2.84@-18.006,-9.9 ; P1-2.84@-18.006,-9.9 cw(c-18.006,-9.329) -18.41,-9.733 ccw(c-18.006,-9.329) P1-2.84@-18.006,-9.9 ; -16.12,-9.9 ccw(c-16.12,-10.23) -16.353,-9.997 cw(c-16.12,-10.23) -16.12,-9.9 ; -16.12,-9.9 cw(c-16.12,-9.57) -16.353,-9.803 ccw(c-16.12,-9.57) -16.12,-9.9 ; -9.404,-8.404 ccw(c-9.807,-8) -9.237,-8 cw(c-9.807,-8) -9.404,-8.404 ; -9.404,-8.404 cw(c-9,-8.807) -9,-8.237 ccw(c-9,-8.807) -9.404,-8.404
P1-86: P1-1.86 P1-2.86 U1.W1 | length 29.6
  Component Side w0.127: v1(-19.404,-11.1) -18.804,-10.5 P1-1.86@-17.25,-10.5 ; v1(-10,-9) U1.W1@-9.5,-8.5 ; -19,-10.696 ccw(c-18.597,-11.1) -19.168,-11.1 cw(c-18.597,-11.1) -19,-10.696 ; -19,-10.696 cw(c-19.404,-10.293) -19.404,-10.864 ccw(c-19.404,-10.293) -19,-10.696 ; -18.38,-10.5 ccw(c-18.38,-10.17) -18.147,-10.403 cw(c-18.38,-10.17) -18.38,-10.5 ; -18.38,-10.5 cw(c-18.38,-10.83) -18.147,-10.597 ccw(c-18.38,-10.83) -18.38,-10.5 ; v1@-9.818,-8.818 ccw(c-10.137,-8.5) -9.686,-8.5 cw(c-10.137,-8.5) v1@-9.818,-8.818 ; v1@-9.818,-8.818 cw(c-9.5,-9.137) -9.5,-8.686 ccw(c-9.5,-9.137) v1@-9.818,-8.818 ; U1.W1@-9.596,-8.596 ccw(c-9.193,-9) -9.764,-9 cw(c-9.193,-9) U1.W1@-9.596,-8.596 ; U1.W1@-9.596,-8.596 cw(c-10,-8.193) -10,-8.764 ccw(c-10,-8.193) U1.W1@-9.596,-8.596
  Solder Side w0.127: P1-2.86@-17.25,-10.4 P1-2.86@-17.25,-10.5 ; v1(-10,-9) -10.385,-9 ; v1@-19.404,-10.864 ccw(c-19.404,-10.293) -19,-10.696 ; v1@-19.404,-10.864 ccw(c-19.404,-10.293) -19,-10.696 ; v1@-19.404,-10.864 ccw(c-19.404,-10.293) -19,-10.696 ; v1@-19.404,-10.864 ccw(c-19.404,-10.293) -19,-10.696 ; v1@-19.168,-11.1 cw(c-18.597,-11.1) -19,-10.696 ; v1@-19.168,-11.1 cw(c-18.597,-11.1) -19,-10.696 ; v1@-19.168,-11.1 cw(c-18.597,-11.1) -19,-10.696 ; v1@-19.168,-11.1 cw(c-18.597,-11.1) -19,-10.696 ; -18.804,-10.5 P1-2.86@-17.25,-10.5 ; -18.804,-10.5 P1-2.86@-17.25,-10.5 ; -18.804,-10.5 v1(-19.404,-11.1) -18.804,-10.5 ; -18.38,-10.5 ccw(c-18.38,-10.17) P1-2.86@-18.147,-10.403 ; -18.38,-10.5 cw(c-18.38,-10.83) P1-2.86@-18.147,-10.597 ; -18.38,-10.5 ccw(c-18.38,-10.17) P1-2.86@-18.147,-10.403 ; -18.38,-10.5 cw(c-18.38,-10.83) P1-2.86@-18.147,-10.597 ; -18.38,-10.5 ccw(c-18.38,-10.17) P1-2.86@-18.147,-10.403 ; -18.38,-10.5 cw(c-18.38,-10.83) P1-2.86@-18.147,-10.597 ; -18.38,-10.5 ccw(c-18.38,-10.17) P1-2.86@-18.147,-10.403 ; -18.38,-10.5 cw(c-18.38,-10.83) P1-2.86@-18.147,-10.597 ; P1-2.86@-17.25,-10.5 -17.2,-10.5 P1-2.86@-17.25,-10.5 ; P1-2.86@-17.25,-10.5 -13.9,-10.5 -12.4,-9 -11.5,-9 -10.385,-9 ; -16.12,-10.5 ccw(c-16.12,-10.83) -16.353,-10.597 cw(c-16.12,-10.83) -16.12,-10.5 ; -16.12,-10.5 cw(c-16.12,-10.17) -16.353,-10.403 ccw(c-16.12,-10.17) -16.12,-10.5 ; -10.385,-9 ccw(c-10.385,-8.805) -10.211,-8.893 cw(c-10.385,-8.805) -10.385,-9 ; -10.385,-9 cw(c-10.385,-9.195) -10.211,-9.107 ccw(c-10.385,-9.195) -10.385,-9
P1-88: P1-1.88 P1-2.88 U1.W2 | length 24.4
  Component Side w0.127: v1@-18.677,-11.1 v1(-18.577,-11.1) P1-1.88@-17.25,-11.1 ; v1(-9,-9) U1.W2@-8.5,-8.5 ; v1@-18.38,-11.1 ccw(c-18.38,-10.77) -18.147,-11.003 cw(c-18.38,-10.77) v1@-18.38,-11.1 ; v1@-18.38,-11.1 cw(c-18.38,-11.43) -18.147,-11.197 ccw(c-18.38,-11.43) v1@-18.38,-11.1 ; P1-1.88@-18.006,-11.1 ccw(c-18.006,-11.671) -18.41,-11.267 cw(c-18.006,-11.671) P1-1.88@-18.006,-11.1 ; P1-1.88@-18.006,-11.1 cw(c-18.006,-10.529) -18.41,-10.933 ccw(c-18.006,-10.529) P1-1.88@-18.006,-11.1 ; v1@-8.818,-8.818 ccw(c-9.137,-8.5) -8.686,-8.5 cw(c-9.137,-8.5) v1@-8.818,-8.818 ; v1@-8.818,-8.818 cw(c-8.5,-9.137) -8.5,-8.686 ccw(c-8.5,-9.137) v1@-8.818,-8.818 ; U1.W2@-8.596,-8.596 ccw(c-8.193,-9) -8.764,-9 cw(c-8.193,-9) U1.W2@-8.596,-8.596 ; U1.W2@-8.596,-8.596 cw(c-9,-8.193) -9,-8.764 ccw(c-9,-8.193) U1.W2@-8.596,-8.596
  Solder Side w0.1: -10.385,-9.5 -9.5,-9.5
  Solder Side w0.127: v1@-18.677,-11.1 v1(-18.577,-11.1) P1-2.88@-17.25,-11.1 -14,-11.1 -12.4,-9.5 -11.5,-9.5 -10.385,-9.5 ; -9.5,-9.5 v1(-9,-9) ; v1@-18.38,-11.1 ccw(c-18.38,-10.77) -18.147,-11.003 cw(c-18.38,-10.77) v1@-18.38,-11.1 ; v1@-18.38,-11.1 cw(c-18.38,-11.43) -18.147,-11.197 ccw(c-18.38,-11.43) v1@-18.38,-11.1 ; P1-2.88@-18.006,-11.1 ccw(c-18.006,-11.671) -18.41,-11.267 cw(c-18.006,-11.671) P1-2.88@-18.006,-11.1 ; P1-2.88@-18.006,-11.1 cw(c-18.006,-10.529) -18.41,-10.933 ccw(c-18.006,-10.529) P1-2.88@-18.006,-11.1 ; -16.12,-11.1 ccw(c-16.12,-11.43) -16.353,-11.197 cw(c-16.12,-11.43) -16.12,-11.1 ; -16.12,-11.1 cw(c-16.12,-10.77) -16.353,-11.003 ccw(c-16.12,-10.77) -16.12,-11.1 ; -9.404,-9.404 ccw(c-9.807,-9) -9.237,-9 cw(c-9.807,-9) -9.404,-9.404 ; -9.404,-9.404 cw(c-9,-9.807) -9,-9.237 ccw(c-9,-9.807) -9.404,-9.404
P1-90: P1-1.90 P1-2.90 U1.Y2 | length 31.4
  Component Side w0.127: v1(-19.404,-12.3) -18.804,-11.7 P1-1.90@-17.25,-11.7 ; v1(-9,-10) U1.Y2@-8.5,-9.5 ; -19,-11.896 ccw(c-18.597,-12.3) -19.168,-12.3 cw(c-18.597,-12.3) -19,-11.896 ; -19,-11.896 cw(c-19.404,-11.493) -19.404,-12.064 ccw(c-19.404,-11.493) -19,-11.896 ; -18.38,-11.7 ccw(c-18.38,-11.37) -18.147,-11.603 cw(c-18.38,-11.37) -18.38,-11.7 ; -18.38,-11.7 cw(c-18.38,-12.03) -18.147,-11.797 ccw(c-18.38,-12.03) -18.38,-11.7 ; v1@-8.818,-9.818 ccw(c-9.137,-9.5) -8.686,-9.5 cw(c-9.137,-9.5) v1@-8.818,-9.818 ; v1@-8.818,-9.818 cw(c-8.5,-10.137) -8.5,-9.686 ccw(c-8.5,-10.137) v1@-8.818,-9.818 ; U1.Y2@-8.596,-9.596 ccw(c-8.193,-10) -8.764,-10 cw(c-8.193,-10) U1.Y2@-8.596,-9.596 ; U1.Y2@-8.596,-9.596 cw(c-9,-9.193) -9,-9.764 ccw(c-9,-9.193) U1.Y2@-8.596,-9.596
  Solder Side w0.127: P1-2.90@-17.2,-11.7 P1-2.90@-17.25,-11.7 ; v1(-9,-10) -9,-10.385 ; v1@-19.404,-12.064 ccw(c-19.404,-11.493) -19,-11.896 ; v1@-19.404,-12.064 ccw(c-19.404,-11.493) -19,-11.896 ; v1@-19.404,-12.064 ccw(c-19.404,-11.493) -19,-11.896 ; v1@-19.404,-12.064 ccw(c-19.404,-11.493) -19,-11.896 ; v1@-19.168,-12.3 cw(c-18.597,-12.3) -19,-11.896 ; v1@-19.168,-12.3 cw(c-18.597,-12.3) -19,-11.896 ; v1@-19.168,-12.3 cw(c-18.597,-12.3) -19,-11.896 ; v1@-19.168,-12.3 cw(c-18.597,-12.3) -19,-11.896 ; -18.804,-11.7 v1(-19.404,-12.3) -18.804,-11.7 ; -18.804,-11.7 P1-2.90@-17.25,-11.7 ; -18.804,-11.7 P1-2.90@-17.25,-11.7 ; -18.38,-11.7 ccw(c-18.38,-11.37) P1-2.90@-18.147,-11.603 ; -18.38,-11.7 cw(c-18.38,-12.03) P1-2.90@-18.147,-11.797 ; -18.38,-11.7 ccw(c-18.38,-11.37) P1-2.90@-18.147,-11.603 ; -18.38,-11.7 cw(c-18.38,-12.03) P1-2.90@-18.147,-11.797 ; -18.38,-11.7 ccw(c-18.38,-11.37) P1-2.90@-18.147,-11.603 ; -18.38,-11.7 cw(c-18.38,-12.03) P1-2.90@-18.147,-11.797 ; -18.38,-11.7 ccw(c-18.38,-11.37) P1-2.90@-18.147,-11.603 ; -18.38,-11.7 cw(c-18.38,-12.03) P1-2.90@-18.147,-11.797 ; P1-2.90@-17.25,-11.7 -9.2,-11.7 -9,-11.5 -9,-10.385 ; -16.12,-11.7 ccw(c-16.12,-12.03) -16.353,-11.797 cw(c-16.12,-12.03) -16.12,-11.7 ; -16.12,-11.7 cw(c-16.12,-11.37) -16.353,-11.603 ccw(c-16.12,-11.37) -16.12,-11.7 ; -9,-10.385 ccw(c-9.195,-10.385) -9.107,-10.211 cw(c-9.195,-10.385) -9,-10.385 ; -9,-10.385 cw(c-8.805,-10.385) -8.893,-10.211 ccw(c-8.805,-10.385) -9,-10.385
P1-92: P1-1.92 P1-2.92 U1.Y3 | length 25.5
  Component Side w0.127: v1@-18.677,-12.3 v1(-18.577,-12.3) P1-1.92@-17.25,-12.3 ; v1(-8,-10) U1.Y3@-7.5,-9.5 ; v1@-18.38,-12.3 ccw(c-18.38,-11.97) -18.147,-12.203 cw(c-18.38,-11.97) v1@-18.38,-12.3 ; v1@-18.38,-12.3 cw(c-18.38,-12.63) -18.147,-12.397 ccw(c-18.38,-12.63) v1@-18.38,-12.3 ; P1-1.92@-18.006,-12.3 ccw(c-18.006,-12.871) -18.41,-12.467 cw(c-18.006,-12.871) P1-1.92@-18.006,-12.3 ; P1-1.92@-18.006,-12.3 cw(c-18.006,-11.729) -18.41,-12.133 ccw(c-18.006,-11.729) P1-1.92@-18.006,-12.3 ; v1@-7.818,-9.818 ccw(c-8.137,-9.5) -7.686,-9.5 cw(c-8.137,-9.5) v1@-7.818,-9.818 ; v1@-7.818,-9.818 cw(c-7.5,-10.137) -7.5,-9.686 ccw(c-7.5,-10.137) v1@-7.818,-9.818 ; U1.Y3@-7.596,-9.596 ccw(c-7.193,-10) -7.764,-10 cw(c-7.193,-10) U1.Y3@-7.596,-9.596 ; U1.Y3@-7.596,-9.596 cw(c-8,-9.193) -8,-9.764 ccw(c-8,-9.193) U1.Y3@-7.596,-9.596
  Solder Side w0.127: v1@-18.677,-12.3 v1(-18.577,-12.3) P1-2.92@-17.25,-12.3 ; v1(-8,-10) -8,-10.385 ; v1@-18.38,-12.3 ccw(c-18.38,-11.97) -18.147,-12.203 cw(c-18.38,-11.97) v1@-18.38,-12.3 ; v1@-18.38,-12.3 cw(c-18.38,-12.63) -18.147,-12.397 ccw(c-18.38,-12.63) v1@-18.38,-12.3 ; P1-2.92@-18.006,-12.3 ccw(c-18.006,-12.871) -18.41,-12.467 cw(c-18.006,-12.871) P1-2.92@-18.006,-12.3 ; P1-2.92@-18.006,-12.3 cw(c-18.006,-11.729) -18.41,-12.133 ccw(c-18.006,-11.729) P1-2.92@-18.006,-12.3 ; P1-2.92@-17.25,-12.3 -17.2,-12.3 P1-2.92@-17.25,-12.3 ; P1-2.92@-17.25,-12.3 -8.8,-12.3 -8,-11.5 -8,-10.385 ; -16.12,-12.3 ccw(c-16.12,-12.63) -16.353,-12.397 cw(c-16.12,-12.63) -16.12,-12.3 ; -16.12,-12.3 cw(c-16.12,-11.97) -16.353,-12.203 ccw(c-16.12,-11.97) -16.12,-12.3 ; -8,-10.385 ccw(c-8.195,-10.385) -8.107,-10.211 cw(c-8.195,-10.385) -8,-10.385 ; -8,-10.385 cw(c-7.805,-10.385) -7.893,-10.211 ccw(c-7.805,-10.385) -8,-10.385
P1-94: P1-1.94 P1-2.94 U1.W4 | length 35.5
  Component Side w0.127: v1(-19.404,-13.5) -18.804,-12.9 P1-1.94@-17.25,-12.9 ; v1(-7,-9) U1.W4@-6.5,-8.5 ; -19,-13.096 ccw(c-18.597,-13.5) -19.168,-13.5 cw(c-18.597,-13.5) -19,-13.096 ; -19,-13.096 cw(c-19.404,-12.693) -19.404,-13.264 ccw(c-19.404,-12.693) -19,-13.096 ; -18.38,-12.9 ccw(c-18.38,-12.57) -18.147,-12.803 cw(c-18.38,-12.57) -18.38,-12.9 ; -18.38,-12.9 cw(c-18.38,-13.23) -18.147,-12.997 ccw(c-18.38,-13.23) -18.38,-12.9 ; v1@-6.818,-8.818 ccw(c-7.137,-8.5) -6.687,-8.5 cw(c-7.137,-8.5) v1@-6.818,-8.818 ; v1@-6.818,-8.818 cw(c-6.5,-9.137) -6.5,-8.686 ccw(c-6.5,-9.137) v1@-6.818,-8.818 ; U1.W4@-6.596,-8.596 ccw(c-6.193,-9) -6.764,-9 cw(c-6.193,-9) U1.W4@-6.596,-8.596 ; U1.W4@-6.596,-8.596 cw(c-7,-8.193) -7,-8.764 ccw(c-7,-8.193) U1.W4@-6.596,-8.596
  Solder Side w0.1: -7.5,-10.385 -7.5,-9.5
  Solder Side w0.127: P1-2.94@-17.2,-12.9 P1-2.94@-17.25,-12.9 ; -7.5,-10.385 -7.5,-11.5 -8.9,-12.9 P1-2.94@-17.25,-12.9 ; -7.5,-9.5 v1(-7,-9) ; v1@-19.404,-13.264 ccw(c-19.404,-12.693) -19,-13.096 ; v1@-19.404,-13.264 ccw(c-19.404,-12.693) -19,-13.096 ; v1@-19.404,-13.264 ccw(c-19.404,-12.693) -19,-13.096 ; v1@-19.404,-13.264 ccw(c-19.404,-12.693) -19,-13.096 ; v1@-19.168,-13.5 cw(c-18.597,-13.5) -19,-13.096 ; v1@-19.168,-13.5 cw(c-18.597,-13.5) -19,-13.096 ; v1@-19.168,-13.5 cw(c-18.597,-13.5) -19,-13.096 ; v1@-19.168,-13.5 cw(c-18.597,-13.5) -19,-13.096 ; -18.804,-12.9 P1-2.94@-17.25,-12.9 ; -18.804,-12.9 v1(-19.404,-13.5) -18.804,-12.9 ; -18.804,-12.9 P1-2.94@-17.25,-12.9 ; -18.38,-12.9 ccw(c-18.38,-12.57) P1-2.94@-18.147,-12.803 ; -18.38,-12.9 cw(c-18.38,-13.23) P1-2.94@-18.147,-12.997 ; -18.38,-12.9 ccw(c-18.38,-12.57) P1-2.94@-18.147,-12.803 ; -18.38,-12.9 cw(c-18.38,-13.23) P1-2.94@-18.147,-12.997 ; -18.38,-12.9 ccw(c-18.38,-12.57) P1-2.94@-18.147,-12.803 ; -18.38,-12.9 cw(c-18.38,-13.23) P1-2.94@-18.147,-12.997 ; -18.38,-12.9 ccw(c-18.38,-12.57) P1-2.94@-18.147,-12.803 ; -18.38,-12.9 cw(c-18.38,-13.23) P1-2.94@-18.147,-12.997 ; -16.12,-12.9 ccw(c-16.12,-13.23) -16.353,-12.997 cw(c-16.12,-13.23) -16.12,-12.9 ; -16.12,-12.9 cw(c-16.12,-12.57) -16.353,-12.803 ccw(c-16.12,-12.57) -16.12,-12.9 ; -7.404,-9.404 ccw(c-7.807,-9) -7.237,-9 cw(c-7.807,-9) -7.404,-9.404 ; -7.404,-9.404 cw(c-7,-9.807) -7,-9.237 ccw(c-7,-9.807) -7.404,-9.404
P1-96: P1-1.96 P1-2.96 U1.Y4 | length 27
  Component Side w0.127: v1@-18.677,-13.5 v1(-18.577,-13.5) P1-1.96@-17.25,-13.5 ; v1(-7,-10) U1.Y4@-6.5,-9.5 ; v1@-18.38,-13.5 ccw(c-18.38,-13.17) -18.147,-13.403 cw(c-18.38,-13.17) v1@-18.38,-13.5 ; v1@-18.38,-13.5 cw(c-18.38,-13.83) -18.147,-13.597 ccw(c-18.38,-13.83) v1@-18.38,-13.5 ; P1-1.96@-18.006,-13.5 ccw(c-18.006,-14.071) -18.41,-13.667 cw(c-18.006,-14.071) P1-1.96@-18.006,-13.5 ; P1-1.96@-18.006,-13.5 cw(c-18.006,-12.929) -18.41,-13.333 ccw(c-18.006,-12.929) P1-1.96@-18.006,-13.5 ; v1@-6.818,-9.818 ccw(c-7.137,-9.5) -6.687,-9.5 cw(c-7.137,-9.5) v1@-6.818,-9.818 ; v1@-6.818,-9.818 cw(c-6.5,-10.137) -6.5,-9.686 ccw(c-6.5,-10.137) v1@-6.818,-9.818 ; U1.Y4@-6.596,-9.596 ccw(c-6.193,-10) -6.764,-10 cw(c-6.193,-10) U1.Y4@-6.596,-9.596 ; U1.Y4@-6.596,-9.596 cw(c-7,-9.193) -7,-9.764 ccw(c-7,-9.193) U1.Y4@-6.596,-9.596
  Solder Side w0.127: v1@-18.677,-13.5 v1(-18.577,-13.5) P1-2.96@-17.25,-13.5 ; v1(-7,-10) -7,-10.385 ; v1@-18.38,-13.5 ccw(c-18.38,-13.17) -18.147,-13.403 cw(c-18.38,-13.17) v1@-18.38,-13.5 ; v1@-18.38,-13.5 cw(c-18.38,-13.83) -18.147,-13.597 ccw(c-18.38,-13.83) v1@-18.38,-13.5 ; P1-2.96@-18.006,-13.5 ccw(c-18.006,-14.071) -18.41,-13.667 cw(c-18.006,-14.071) P1-2.96@-18.006,-13.5 ; P1-2.96@-18.006,-13.5 cw(c-18.006,-12.929) -18.41,-13.333 ccw(c-18.006,-12.929) P1-2.96@-18.006,-13.5 ; P1-2.96@-17.25,-13.5 -17.2,-13.5 P1-2.96@-17.25,-13.5 ; P1-2.96@-17.25,-13.5 -15.6,-13.5 -15.4,-13.3 -8.8,-13.3 -7,-11.5 -7,-10.385 ; -16.12,-13.5 ccw(c-16.12,-13.83) -16.353,-13.597 cw(c-16.12,-13.83) -16.12,-13.5 ; -16.12,-13.5 cw(c-16.12,-13.17) -16.353,-13.403 ccw(c-16.12,-13.17) -16.12,-13.5 ; -7,-10.385 ccw(c-7.195,-10.385) -7.107,-10.211 cw(c-7.195,-10.385) -7,-10.385 ; -7,-10.385 cw(c-6.805,-10.385) -6.893,-10.211 ccw(c-6.805,-10.385) -7,-10.385
P1-98: P1-1.98 P1-2.98 U1.Y5 | length 30.3
  Component Side w0.127: v1(-19.404,-14.7) -18.804,-14.1 P1-1.98@-17.25,-14.1 ; v1(-6,-10) U1.Y5@-5.5,-9.5 ; -19,-14.296 ccw(c-18.597,-14.7) -19.168,-14.7 cw(c-18.597,-14.7) -19,-14.296 ; -19,-14.296 cw(c-19.404,-13.893) -19.404,-14.464 ccw(c-19.404,-13.893) -19,-14.296 ; -18.38,-14.1 ccw(c-18.38,-13.77) -18.147,-14.003 cw(c-18.38,-13.77) -18.38,-14.1 ; -18.38,-14.1 cw(c-18.38,-14.43) -18.147,-14.197 ccw(c-18.38,-14.43) -18.38,-14.1 ; v1@-5.818,-9.818 ccw(c-6.137,-9.5) -5.687,-9.5 cw(c-6.137,-9.5) v1@-5.818,-9.818 ; v1@-5.818,-9.818 cw(c-5.5,-10.137) -5.5,-9.686 ccw(c-5.5,-10.137) v1@-5.818,-9.818 ; U1.Y5@-5.596,-9.596 ccw(c-5.193,-10) -5.764,-10 cw(c-5.193,-10) U1.Y5@-5.596,-9.596 ; U1.Y5@-5.596,-9.596 cw(c-6,-9.193) -6,-9.764 ccw(c-6,-9.193) U1.Y5@-5.596,-9.596
  Solder Side w0.127: v1(-19.404,-14.7) -18.804,-14.1 P1-2.98@-17.25,-14.1 ; P1-2.98@-17.2,-14.1 P1-2.98@-17.25,-14.1 ; P1-2.98@-17.15,-14.2 P1-2.98@-17.25,-14.1 ; v1(-6,-10) -6,-10.385 ; -19,-14.296 ccw(c-18.597,-14.7) -19.168,-14.7 cw(c-18.597,-14.7) -19,-14.296 ; -19,-14.296 cw(c-19.404,-13.893) -19.404,-14.464 ccw(c-19.404,-13.893) -19,-14.296 ; -18.38,-14.1 ccw(c-18.38,-13.77) -18.147,-14.003 cw(c-18.38,-13.77) -18.38,-14.1 ; -18.38,-14.1 cw(c-18.38,-14.43) -18.147,-14.197 ccw(c-18.38,-14.43) -18.38,-14.1 ; P1-2.98@-17.25,-14.1 -15.487,-14.1 -14.987,-13.6 -8.1,-13.6 -6,-11.5 -6,-10.385 ; -16.12,-14.1 ccw(c-16.12,-14.43) -16.353,-14.197 cw(c-16.12,-14.43) -16.12,-14.1 ; -16.12,-14.1 cw(c-16.12,-13.77) -16.353,-14.003 ccw(c-16.12,-13.77) -16.12,-14.1 ; -6,-10.385 ccw(c-6.195,-10.385) -6.107,-10.211 cw(c-6.195,-10.385) -6,-10.385 ; -6,-10.385 cw(c-5.805,-10.385) -5.893,-10.211 ccw(c-5.805,-10.385) -6,-10.385
P2-01: P2-1.1 P2-2.1 U1.A15 | length 32.3
  Component Side w0.127: U1.A15@4.5,9.5 v1(5,10) ; P2-1.1@17.25,14.7 18.804,14.7 v1(19.404,14.1) ; U1.A15@4.596,9.596 ccw(c4.193,10) 4.764,10 cw(c4.193,10) U1.A15@4.596,9.596 ; U1.A15@4.596,9.596 cw(c5,9.193) 5,9.764 ccw(c5,9.193) U1.A15@4.596,9.596 ; v1@4.818,9.818 ccw(c5.137,9.5) 4.686,9.5 cw(c5.137,9.5) v1@4.818,9.818 ; v1@4.818,9.818 cw(c4.5,10.137) 4.5,9.686 ccw(c4.5,10.137) v1@4.818,9.818 ; 18.38,14.7 ccw(c18.38,14.37) 18.147,14.603 cw(c18.38,14.37) 18.38,14.7 ; 18.38,14.7 cw(c18.38,15.03) 18.147,14.797 ccw(c18.38,15.03) 18.38,14.7 ; 19,14.504 ccw(c19.404,14.907) 19.404,14.336 cw(c19.404,14.907) 19,14.504 ; 19,14.504 cw(c18.597,14.1) 19.168,14.1 ccw(c18.597,14.1) 19,14.504
  Solder Side w0.127: v1(5,10) 5,10.5 ; P2-2.1@17.2,14.7 P2-2.1@17.25,14.7 ; v1(19.404,14.1) 18.804,14.7 P2-2.1@17.25,14.7 ; 5,10.5 ccw(c5.41,10.5) 5.15,10.183 cw(c5.41,10.5) 5,10.5 ; 5,10.5 cw(c4.59,10.5) 4.85,10.183 ccw(c4.59,10.5) 5,10.5 ; 5,10.5 5,11.1 5,11.2 8.3,14.5 15.8,14.5 15.9,14.6 ; 15.9,14.6 ccw(c15.9,15.221) 16.351,14.794 cw(c15.9,15.221) 15.9,14.6 ; 15.9,14.6 17.15,14.6 P2-2.1@17.25,14.7 ; 18.38,14.7 ccw(c18.38,14.37) 18.147,14.603 cw(c18.38,14.37) 18.38,14.7 ; 18.38,14.7 cw(c18.38,15.03) 18.147,14.797 ccw(c18.38,15.03) 18.38,14.7 ; 19,14.504 ccw(c19.404,14.907) 19.404,14.336 cw(c19.404,14.907) 19,14.504 ; 19,14.504 cw(c18.597,14.1) 19.168,14.1 ccw(c18.597,14.1) 19,14.504 ; 16.195,14.6 ccw(c16.195,14.941) 16.443,14.707 cw(c16.195,14.941) 16.195,14.6
P2-03: P2-1.3 P2-2.3 U1.A16 | length 28.7
  Component Side w0.127: U1.A16@5.5,9.5 v1(6,10) ; P2-1.3@17.25,14.1 v1(18.577,14.1) v1@18.677,14.1 ; U1.A16@5.596,9.596 ccw(c5.193,10) 5.763,10 cw(c5.193,10) U1.A16@5.596,9.596 ; U1.A16@5.596,9.596 cw(c6,9.193) 6,9.764 ccw(c6,9.193) U1.A16@5.596,9.596 ; v1@5.818,9.818 ccw(c6.137,9.5) 5.686,9.5 cw(c6.137,9.5) v1@5.818,9.818 ; v1@5.818,9.818 cw(c5.5,10.137) 5.5,9.686 ccw(c5.5,10.137) v1@5.818,9.818 ; P2-1.3@18.006,14.1 ccw(c18.006,14.671) 18.41,14.267 cw(c18.006,14.671) P2-1.3@18.006,14.1 ; P2-1.3@18.006,14.1 cw(c18.006,13.529) 18.41,13.933 ccw(c18.006,13.529) P2-1.3@18.006,14.1 ; v1@18.38,14.1 ccw(c18.38,13.77) 18.147,14.003 cw(c18.38,13.77) v1@18.38,14.1 ; v1@18.38,14.1 cw(c18.38,14.43) 18.147,14.197 ccw(c18.38,14.43) v1@18.38,14.1
  Solder Side w0.127: v1(6,10) 6,10.5 ; P2-2.3@17.25,14.1 8.3,14.1 6,11.8 6,11.5 6,10.5 ; P2-2.3@17.45,14.1 v1(18.577,14.1) v1@18.677,14.1 ; 6,10.5 ccw(c6.41,10.5) 6.15,10.183 cw(c6.41,10.5) 6,10.5 ; 6,10.5 cw(c5.59,10.5) 5.85,10.183 ccw(c5.59,10.5) 6,10.5 ; 16.12,14.1 ccw(c16.12,14.43) 16.353,14.197 cw(c16.12,14.43) 16.12,14.1 ; 16.12,14.1 cw(c16.12,13.77) 16.353,14.003 ccw(c16.12,13.77) 16.12,14.1 ; P2-2.3@18.006,14.1 ccw(c18.006,14.671) 18.41,14.267 cw(c18.006,14.671) P2-2.3@18.006,14.1 ; P2-2.3@18.006,14.1 cw(c18.006,13.529) 18.41,13.933 ccw(c18.006,13.529) P2-2.3@18.006,14.1 ; v1@18.38,14.1 ccw(c18.38,13.77) 18.147,14.003 cw(c18.38,13.77) v1@18.38,14.1 ; v1@18.38,14.1 cw(c18.38,14.43) 18.147,14.197 ccw(c18.38,14.43) v1@18.38,14.1
P2-05: P2-1.5 P2-2.5 U1.C17 | length 32.8
  Component Side w0.127: U1.C17@6.5,7.5 v1(7,8) ; P2-1.5@17.25,13.5 18.804,13.5 v1(19.404,12.9) ; U1.C17@6.596,7.596 ccw(c6.193,8) 6.764,8 cw(c6.193,8) U1.C17@6.596,7.596 ; U1.C17@6.596,7.596 cw(c7,7.193) 7,7.764 ccw(c7,7.193) U1.C17@6.596,7.596 ; v1@6.818,7.818 ccw(c7.137,7.5) 6.687,7.5 cw(c7.137,7.5) v1@6.818,7.818 ; v1@6.818,7.818 cw(c6.5,8.137) 6.5,7.686 ccw(c6.5,8.137) v1@6.818,7.818 ; 18.38,13.5 ccw(c18.38,13.17) 18.147,13.403 cw(c18.38,13.17) 18.38,13.5 ; 18.38,13.5 cw(c18.38,13.83) 18.147,13.597 ccw(c18.38,13.83) 18.38,13.5 ; 19,13.304 ccw(c19.404,13.707) 19.404,13.136 cw(c19.404,13.707) 19,13.304 ; 19,13.304 cw(c18.597,12.9) 19.168,12.9 ccw(c18.597,12.9) 19,13.304
  Solder Side w0.1: 6.5,8.5 6.5,10.385 6.5,11.5
  Solder Side w0.127: 6.5,8.5 v1(7,8) ; 6.5,11.5 6.5,11.9 8.1,13.5 P2-2.5@17.25,13.5 ; P2-2.5@17.2,13.5 P2-2.5@17.25,13.5 ; v1(19.404,12.9) 18.804,13.5 P2-2.5@17.25,13.5 ; 6.596,8.404 ccw(c7,8.807) 7,8.237 cw(c7,8.807) 6.596,8.404 ; 6.596,8.404 cw(c6.193,8) 6.764,8 ccw(c6.193,8) 6.596,8.404 ; 16.12,13.5 ccw(c16.12,13.83) 16.353,13.597 cw(c16.12,13.83) 16.12,13.5 ; 16.12,13.5 cw(c16.12,13.17) 16.353,13.403 ccw(c16.12,13.17) 16.12,13.5 ; 18.38,13.5 ccw(c18.38,13.17) 18.147,13.403 cw(c18.38,13.17) 18.38,13.5 ; 18.38,13.5 cw(c18.38,13.83) 18.147,13.597 ccw(c18.38,13.83) 18.38,13.5 ; 19,13.304 ccw(c19.404,13.707) 19.404,13.136 cw(c19.404,13.707) 19,13.304 ; 19,13.304 cw(c18.597,12.9) 19.168,12.9 ccw(c18.597,12.9) 19,13.304
P2-07: P2-1.7 P2-2.7 U1.A17 | length 26.9
  Component Side w0.127: U1.A17@6.5,9.5 v1(7,10) ; P2-1.7@17.25,12.9 v1(18.577,12.9) v1@18.677,12.9 ; U1.A17@6.596,9.596 ccw(c6.193,10) 6.764,10 cw(c6.193,10) U1.A17@6.596,9.596 ; U1.A17@6.596,9.596 cw(c7,9.193) 7,9.764 ccw(c7,9.193) U1.A17@6.596,9.596 ; v1@6.818,9.818 ccw(c7.137,9.5) 6.687,9.5 cw(c7.137,9.5) v1@6.818,9.818 ; v1@6.818,9.818 cw(c6.5,10.137) 6.5,9.686 ccw(c6.5,10.137) v1@6.818,9.818 ; P2-1.7@18.006,12.9 ccw(c18.006,13.471) 18.41,13.067 cw(c18.006,13.471) P2-1.7@18.006,12.9 ; P2-1.7@18.006,12.9 cw(c18.006,12.329) 18.41,12.733 ccw(c18.006,12.329) P2-1.7@18.006,12.9 ; v1@18.38,12.9 ccw(c18.38,12.57) 18.147,12.803 cw(c18.38,12.57) v1@18.38,12.9 ; v1@18.38,12.9 cw(c18.38,13.23) 18.147,12.997 ccw(c18.38,13.23) v1@18.38,12.9
  Solder Side w0.127: v1(7,10) 7,10.385 ; v1@18.677,12.9 v1(18.577,12.9) P2-2.7@17.25,12.9 7.9,12.9 7,12 7,11.5 7,10.385 ; 7,10.385 ccw(c7.195,10.385) 7.107,10.211 cw(c7.195,10.385) 7,10.385 ; 7,10.385 cw(c6.805,10.385) 6.893,10.211 ccw(c6.805,10.385) 7,10.385 ; 16.12,12.9 ccw(c16.12,13.23) 16.353,12.997 cw(c16.12,13.23) 16.12,12.9 ; 16.12,12.9 cw(c16.12,12.57) 16.353,12.803 ccw(c16.12,12.57) 16.12,12.9 ; P2-2.7@18.006,12.9 ccw(c18.006,13.471) 18.41,13.067 cw(c18.006,13.471) P2-2.7@18.006,12.9 ; P2-2.7@18.006,12.9 cw(c18.006,12.329) 18.41,12.733 ccw(c18.006,12.329) P2-2.7@18.006,12.9 ; v1@18.38,12.9 ccw(c18.38,12.57) 18.147,12.803 cw(c18.38,12.57) v1@18.38,12.9 ; v1@18.38,12.9 cw(c18.38,13.23) 18.147,12.997 ccw(c18.38,13.23) v1@18.38,12.9
P2-09: P2-1.9 P2-2.9 U1.B17 | length 30.3
  Component Side w0.127: U1.B17@6.5,8.5 v1(7,9) ; P2-1.9@17.25,12.3 18.804,12.3 v1(19.404,11.7) ; U1.B17@6.596,8.596 ccw(c6.193,9) 6.764,9 cw(c6.193,9) U1.B17@6.596,8.596 ; U1.B17@6.596,8.596 cw(c7,8.193) 7,8.764 ccw(c7,8.193) U1.B17@6.596,8.596 ; v1@6.818,8.818 ccw(c7.137,8.5) 6.687,8.5 cw(c7.137,8.5) v1@6.818,8.818 ; v1@6.818,8.818 cw(c6.5,9.137) 6.5,8.686 ccw(c6.5,9.137) v1@6.818,8.818 ; 18.38,12.3 ccw(c18.38,11.97) 18.147,12.203 cw(c18.38,11.97) 18.38,12.3 ; 18.38,12.3 cw(c18.38,12.63) 18.147,12.397 ccw(c18.38,12.63) 18.38,12.3 ; 19,12.104 ccw(c19.404,12.507) 19.404,11.936 cw(c19.404,12.507) 19,12.104 ; 19,12.104 cw(c18.597,11.7) 19.168,11.7 ccw(c18.597,11.7) 19,12.104
  Solder Side w0.1: 7.5,9.5 7.5,10.385 7.5,11.4
  Solder Side w0.127: v1(7,9) 7.5,9.5 ; 7.5,11.4 7.5,12.1 7.7,12.3 P2-2.9@17.25,12.3 18.804,12.3 v1(19.404,11.7) ; 7.404,9.404 ccw(c7.808,9) 7.237,9 cw(c7.808,9) 7.404,9.404 ; 7.404,9.404 cw(c7,9.807) 7,9.237 ccw(c7,9.807) 7.404,9.404 ; 16.12,12.3 ccw(c16.12,12.63) 16.353,12.397 cw(c16.12,12.63) 16.12,12.3 ; 16.12,12.3 cw(c16.12,11.97) 16.353,12.203 ccw(c16.12,11.97) 16.12,12.3 ; 18.38,12.3 ccw(c18.38,11.97) 18.147,12.203 cw(c18.38,11.97) 18.38,12.3 ; 18.38,12.3 cw(c18.38,12.63) 18.147,12.397 ccw(c18.38,12.63) 18.38,12.3 ; 19,12.104 ccw(c19.404,12.507) 19.404,11.936 cw(c19.404,12.507) 19,12.104 ; 19,12.104 cw(c18.597,11.7) 19.168,11.7 ccw(c18.597,11.7) 19,12.104
P2-11: P2-1.11 P2-2.11 U1.A18 | length 25.1
  Component Side w0.127: U1.A18@7.5,9.5 v1(8,10) ; P2-1.11@17.25,11.7 v1(18.577,11.7) v1@18.677,11.7 ; U1.A18@7.596,9.596 ccw(c7.193,10) 7.764,10 cw(c7.193,10) U1.A18@7.596,9.596 ; U1.A18@7.596,9.596 cw(c8,9.193) 8,9.764 ccw(c8,9.193) U1.A18@7.596,9.596 ; v1@7.818,9.818 ccw(c8.137,9.5) 7.687,9.5 cw(c8.137,9.5) v1@7.818,9.818 ; v1@7.818,9.818 cw(c7.5,10.137) 7.5,9.686 ccw(c7.5,10.137) v1@7.818,9.818 ; P2-1.11@18.006,11.7 ccw(c18.006,12.271) 18.41,11.867 cw(c18.006,12.271) P2-1.11@18.006,11.7 ; P2-1.11@18.006,11.7 cw(c18.006,11.129) 18.41,11.533 ccw(c18.006,11.129) P2-1.11@18.006,11.7 ; v1@18.38,11.7 ccw(c18.38,11.37) 18.147,11.603 cw(c18.38,11.37) v1@18.38,11.7 ; v1@18.38,11.7 cw(c18.38,12.03) 18.147,11.797 ccw(c18.38,12.03) v1@18.38,11.7
  Solder Side w0.127: v1(8,10) 8,10.385 ; v1@18.677,11.7 v1(18.577,11.7) P2-2.11@17.25,11.7 8.3,11.7 8,11.4 8,11.2 8,10.385 ; 8,10.385 ccw(c8.195,10.385) 8.107,10.211 cw(c8.195,10.385) 8,10.385 ; 8,10.385 cw(c7.805,10.385) 7.893,10.211 ccw(c7.805,10.385) 8,10.385 ; 16.12,11.7 ccw(c16.12,12.03) 16.353,11.797 cw(c16.12,12.03) 16.12,11.7 ; 16.12,11.7 cw(c16.12,11.37) 16.353,11.603 ccw(c16.12,11.37) 16.12,11.7 ; P2-2.11@18.006,11.7 ccw(c18.006,12.271) 18.41,11.867 cw(c18.006,12.271) P2-2.11@18.006,11.7 ; P2-2.11@18.006,11.7 cw(c18.006,11.129) 18.41,11.533 ccw(c18.006,11.129) P2-2.11@18.006,11.7 ; v1@18.38,11.7 ccw(c18.38,11.37) 18.147,11.603 cw(c18.38,11.37) v1@18.38,11.7 ; v1@18.38,11.7 cw(c18.38,12.03) 18.147,11.797 ccw(c18.38,12.03) v1@18.38,11.7
P2-13: P2-1.13 P2-2.13 U1.B18 | length 28.2
  Component Side w0.127: U1.B18@7.5,8.5 v1(8,9) ; P2-1.13@17.25,11.1 18.804,11.1 v1(19.404,10.5) ; U1.B18@7.596,8.596 ccw(c7.193,9) 7.764,9 cw(c7.193,9) U1.B18@7.596,8.596 ; U1.B18@7.596,8.596 cw(c8,8.193) 8,8.764 ccw(c8,8.193) U1.B18@7.596,8.596 ; v1@7.818,8.818 ccw(c8.137,8.5) 7.687,8.5 cw(c8.137,8.5) v1@7.818,8.818 ; v1@7.818,8.818 cw(c7.5,9.137) 7.5,8.686 ccw(c7.5,9.137) v1@7.818,8.818 ; 18.38,11.1 ccw(c18.38,10.77) 18.147,11.003 cw(c18.38,10.77) 18.38,11.1 ; 18.38,11.1 cw(c18.38,11.43) 18.147,11.197 ccw(c18.38,11.43) 18.38,11.1 ; 19,10.904 ccw(c19.404,11.307) 19.404,10.736 cw(c19.404,11.307) 19,10.904 ; 19,10.904 cw(c18.597,10.5) 19.168,10.5 ccw(c18.597,10.5) 19,10.904
  Solder Side w0.1: 8.5,9.5 8.5,10.385 8.5,10.8
  Solder Side w0.127: v1(8,9) 8.5,9.5 ; 8.5,10.8 8.5,10.9 8.7,11.1 P2-2.13@17.25,11.1 ; P2-2.13@17.2,11.1 P2-2.13@17.25,11.1 ; v1(19.404,10.5) 18.804,11.1 P2-2.13@17.25,11.1 ; 8.404,9.404 ccw(c8.808,9) 8.237,9 cw(c8.808,9) 8.404,9.404 ; 8.404,9.404 cw(c8,9.807) 8,9.237 ccw(c8,9.807) 8.404,9.404 ; 16.12,11.1 ccw(c16.12,11.43) 16.353,11.197 cw(c16.12,11.43) 16.12,11.1 ; 16.12,11.1 cw(c16.12,10.77) 16.353,11.003 ccw(c16.12,10.77) 16.12,11.1 ; 18.38,11.1 ccw(c18.38,10.77) 18.147,11.003 cw(c18.38,10.77) 18.38,11.1 ; 18.38,11.1 cw(c18.38,11.43) 18.147,11.197 ccw(c18.38,11.43) 18.38,11.1 ; 19,10.904 ccw(c19.404,11.307) 19.404,10.736 cw(c19.404,11.307) 19,10.904 ; 19,10.904 cw(c18.597,10.5) 19.168,10.5 ccw(c18.597,10.5) 19,10.904